# Altium PCB PCB.PcbDoc
Units mil, origin at the board's own origin, x right, y up, seen from the top; angles counter-clockwise.
Board outline 3935 x 3935 mil, 4 copper layers (Top Layer, GNDL, PWRL, Bottom Layer), stack 23.756 mil thick; 39 components, 61 nets, 233 pads, 284 vias.
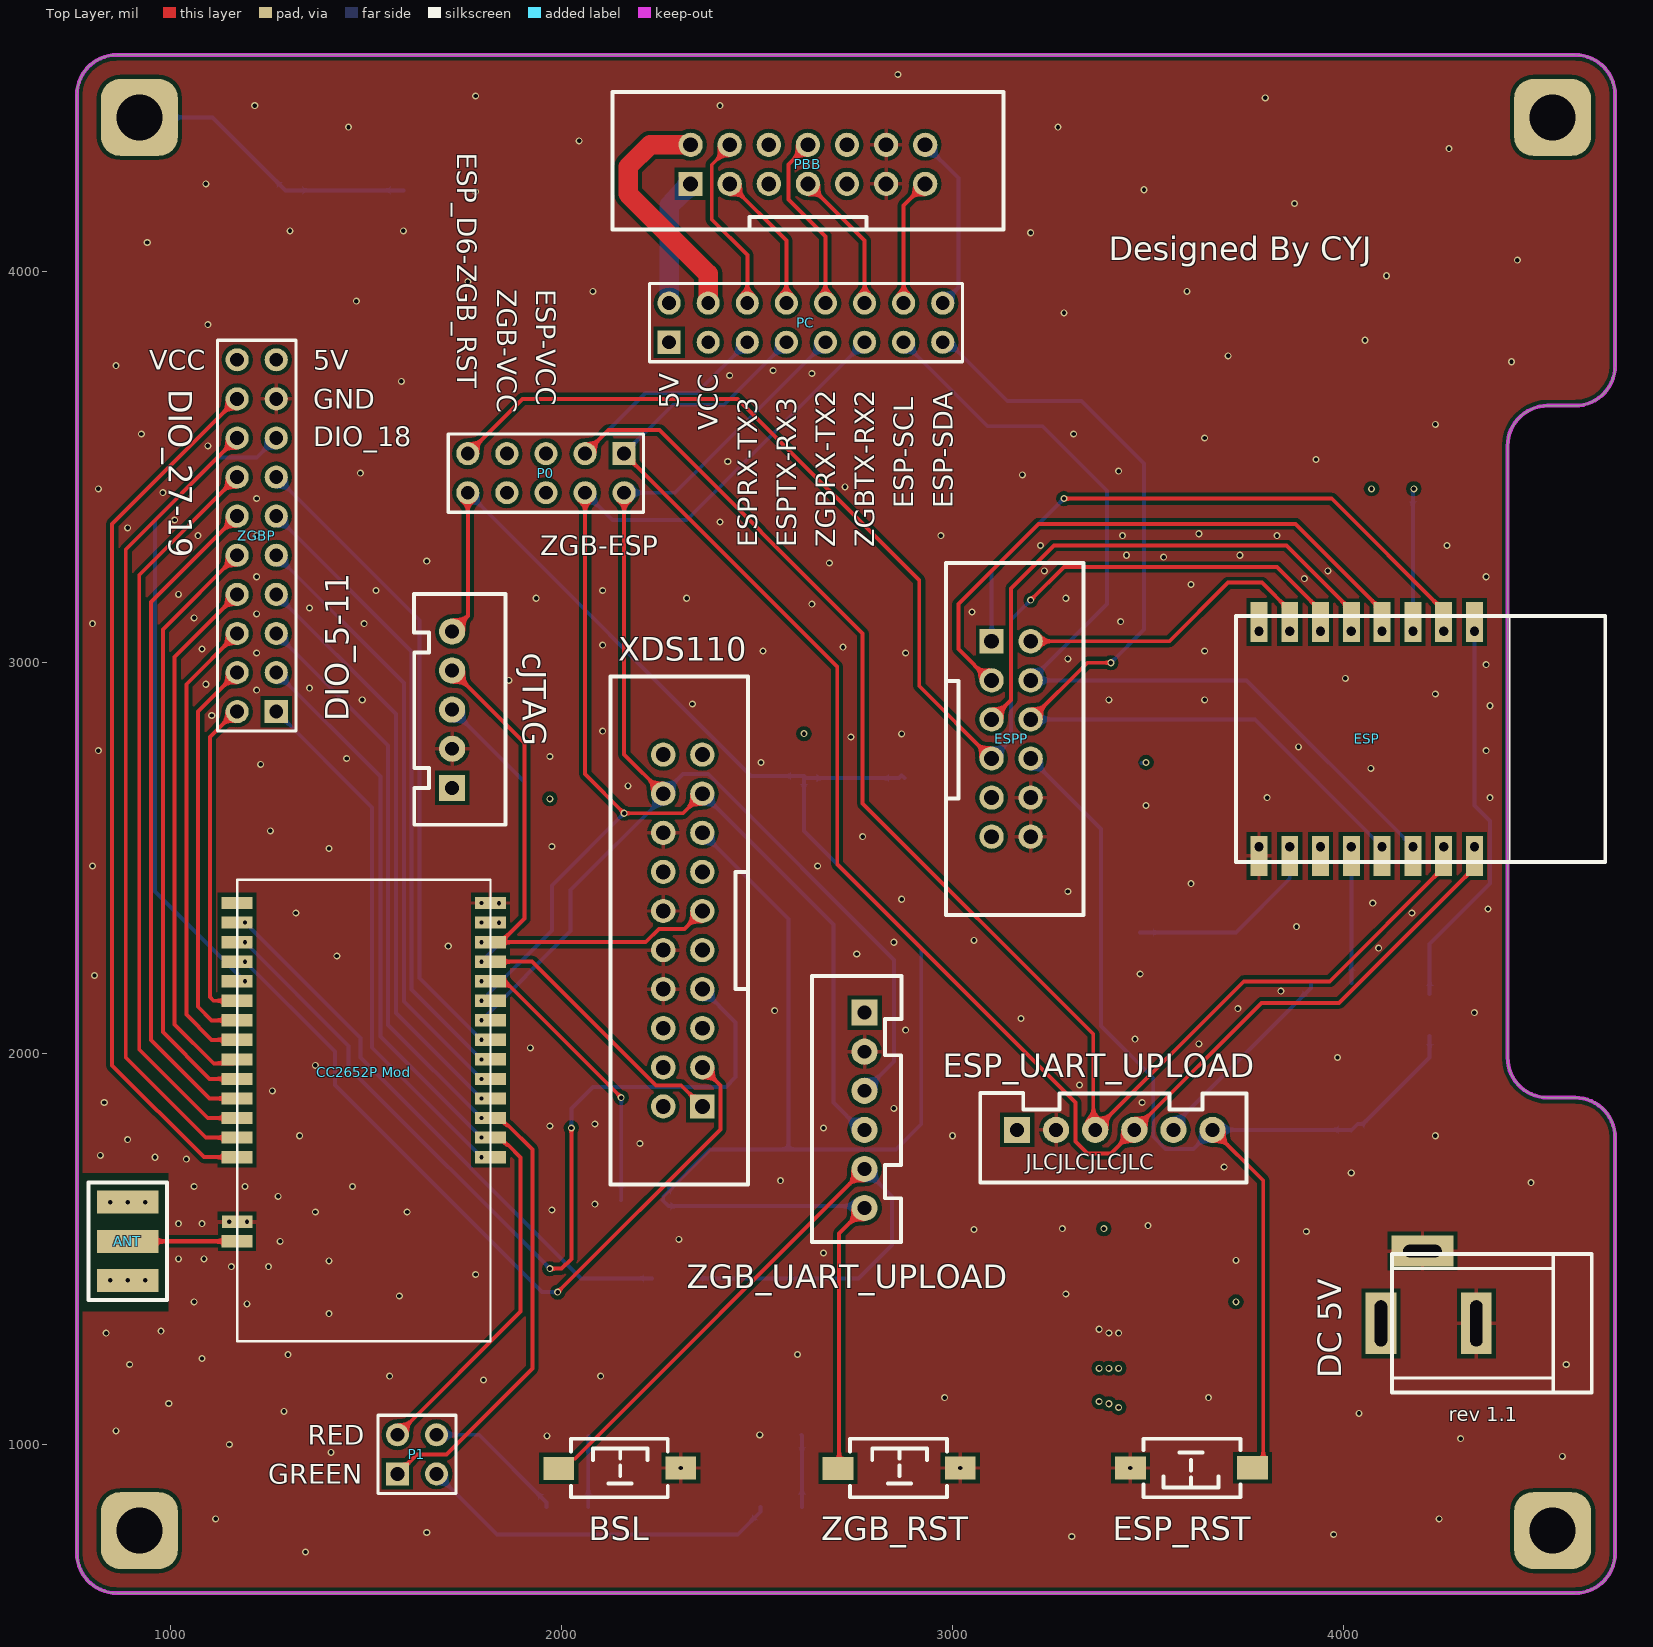
[diagram p0: Top Layer view]
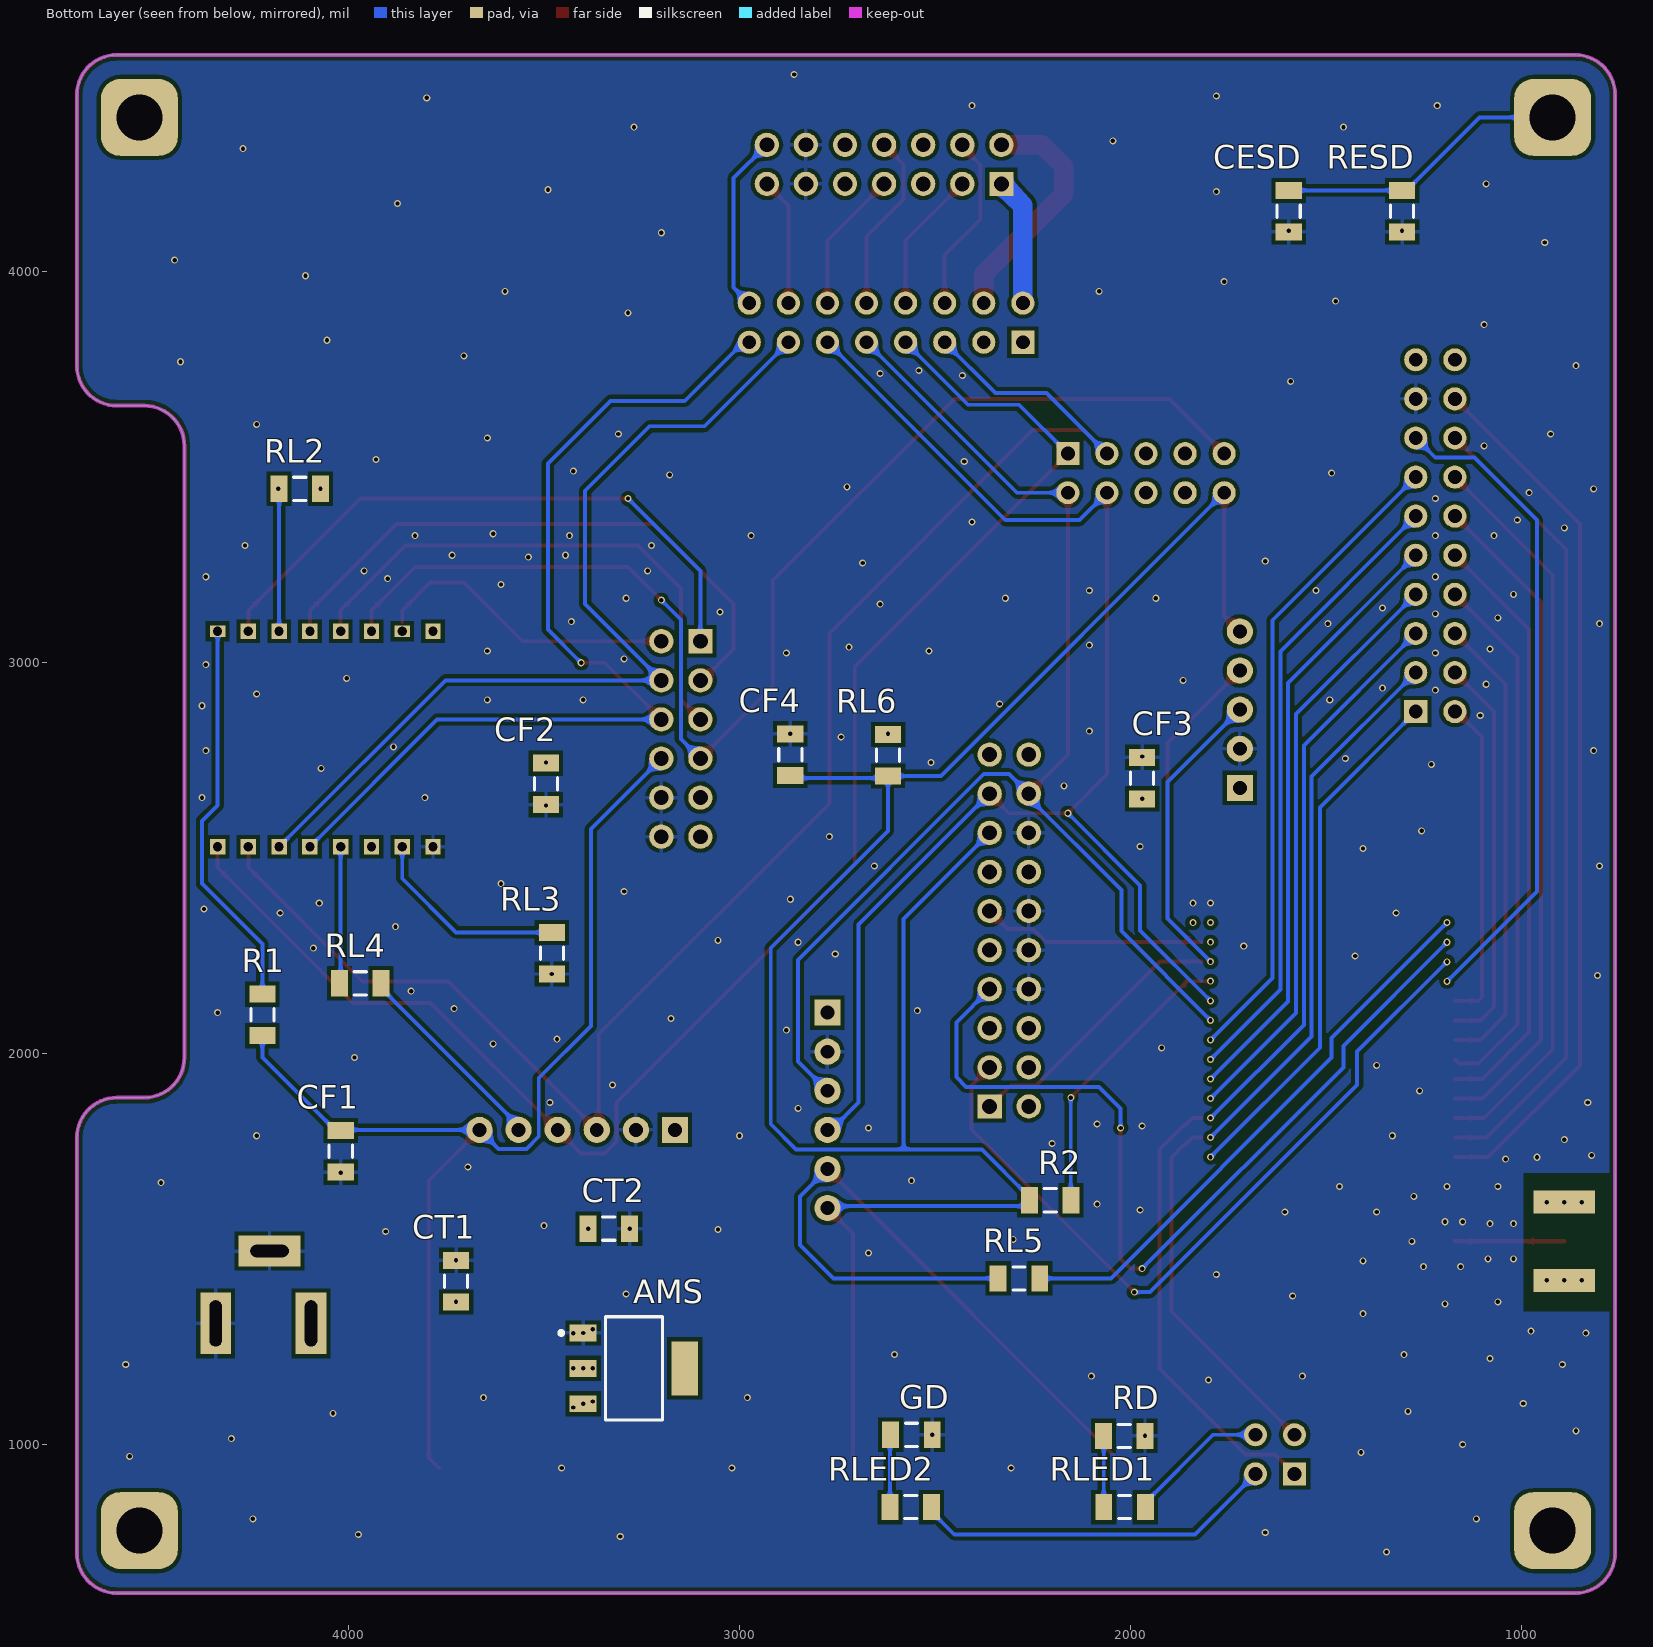
[diagram p1: Bottom Layer view, seen from below]
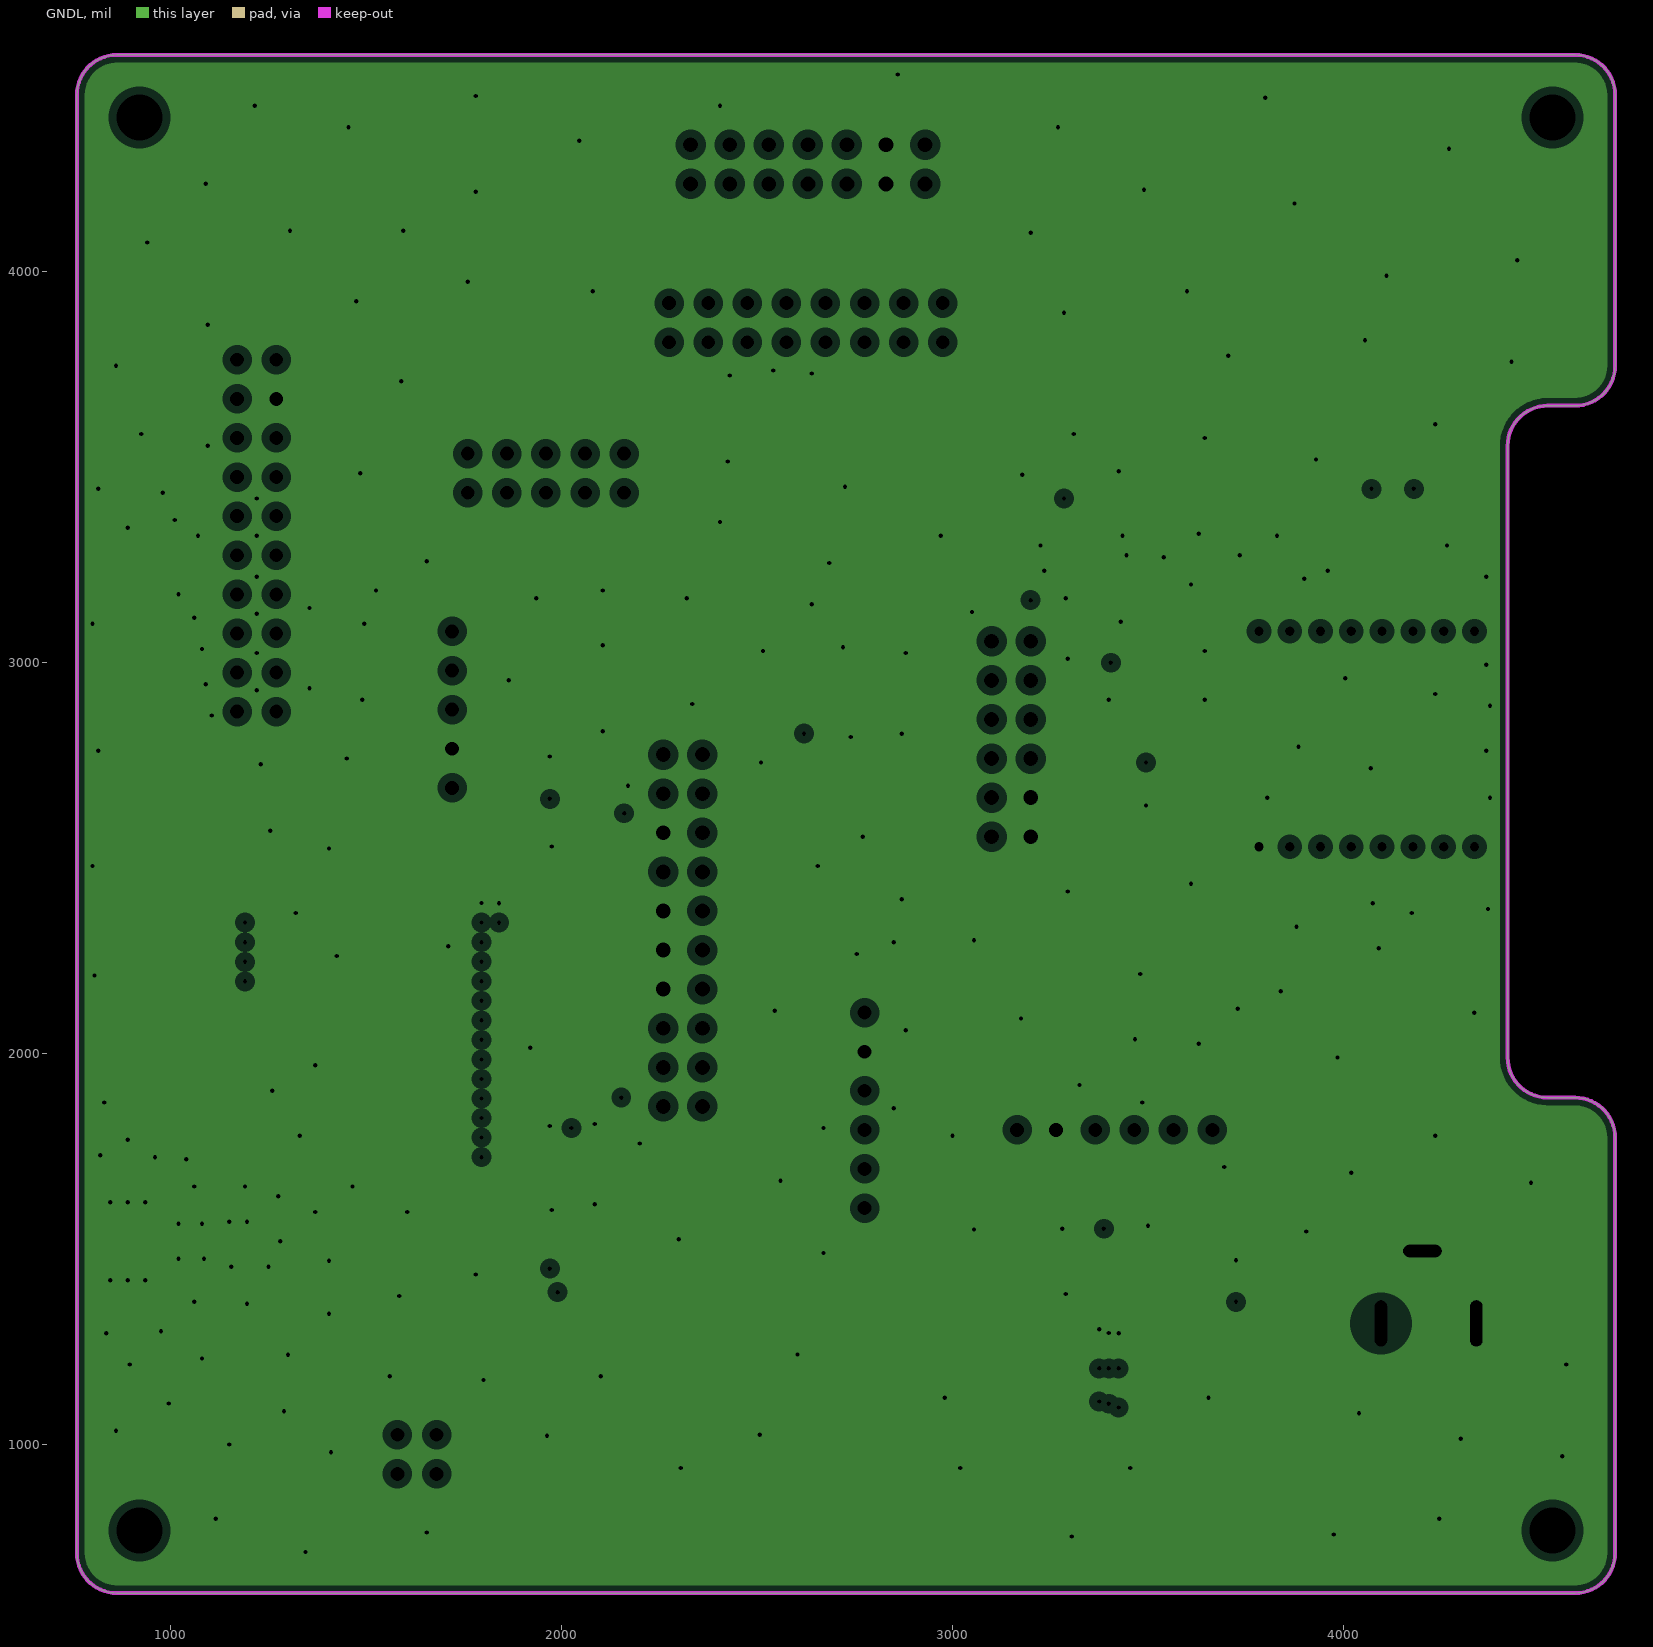
[diagram p2: GNDL, clearances drawn from the general rule]
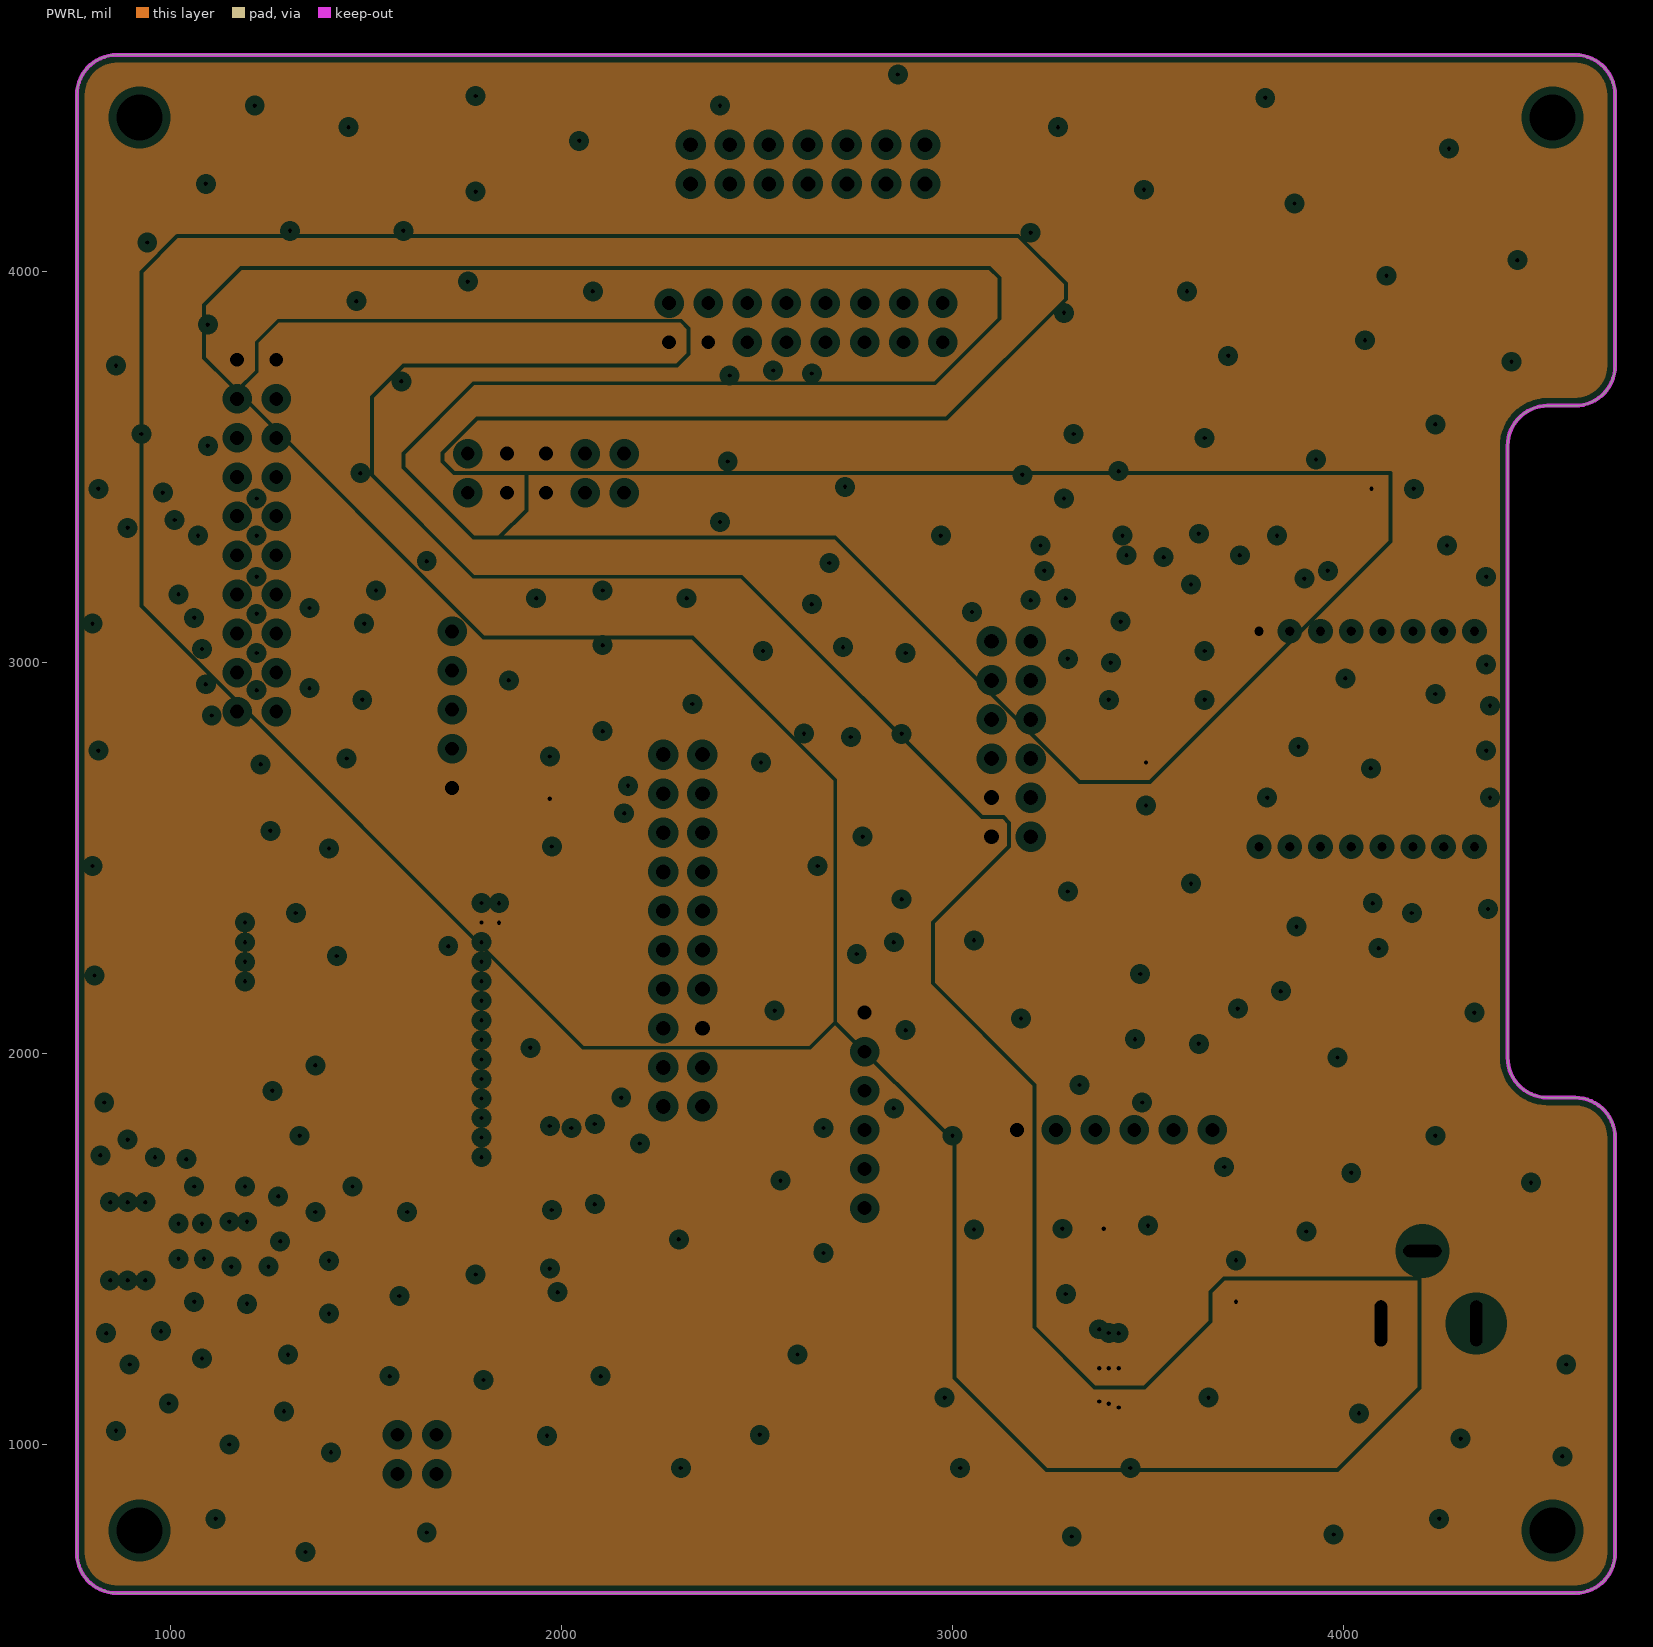
[diagram p3: PWRL, clearances drawn from the general rule]
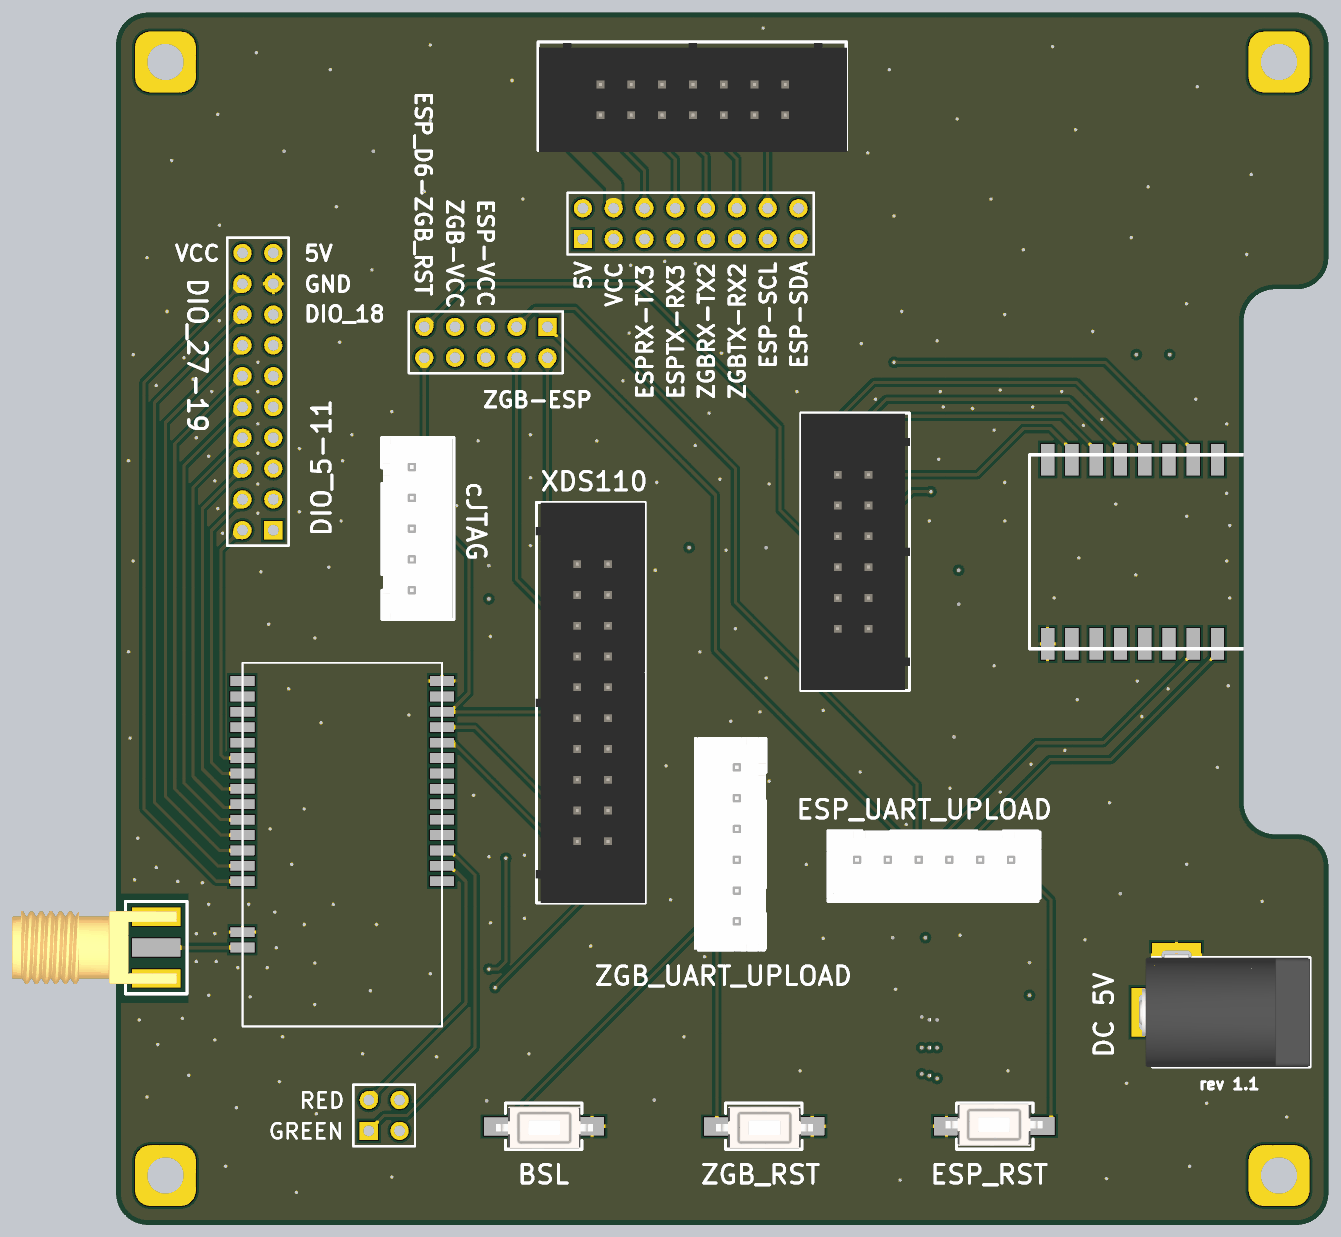
[diagram p4: 3D render of the assembled board from above, using the file's embedded part models]

## Layer stack, top to bottom
Top Solder: solder mask 0.4, Solder Resist, Dk 3.5
Top Layer: signal copper 1.4
Dielectric 2: prepreg 2.8, PP-006, Dk 4.1
GNDL: plane copper 1.378, net GND
Dielectric 1: dielectric 12.6, FR-4, Dk 4.8
PWRL: plane copper 1.378, net (Multiple Nets)
Dielectric 3: prepreg 2.8, PP-006, Dk 4.1
Bottom Layer: signal copper 1.4
Bottom Solder: solder mask 0.4, Solder Resist, Dk 3.5

## Board outline
760,722.43 ccw(c862.43,722.43) 862.43,620 4592.57,620 ccw(c4592.57,722.43) 4695,722.43 4695,1785 ccw(c4592.57,1785) 4592.57,1887.43 4522.43,1887.43 4522.43,1887.57 cw(c4522.43,1990) 4420,1990 4420,3555 cw(c4522.43,3555) 4522.43,3657.43 4522.43,3657.57 4592.57,3657.57 ccw(c4592.57,3760) 4695,3760 4695,4452.57 ccw(c4592.57,4452.57) 4592.57,4555 862.43,4555 ccw(c862.43,4452.57) 760,4452.57

## Design rules (kind name [scope] priority, off if disabled: settings)
Clearance [All] p1: gap=10 ignorepadtopadclearanceinfootprint=FALSE except(0: Arc-Hole Track-Hole SMDPad-Hole THPad-Hole Via-Hole Fill-Hole Poly-Hole Region-Hole Text-Hole)
ComponentClearance ComponentClearance_1 [HasFootprint('JLC_CLI_NO') vs HasFootprint('XH2.54-LI-6P')] p1: gap=0 collisioncheckmode=3 verticalgap=0 showdistances=FALSE
ComponentClearance [All] p2: gap=10 collisioncheckmode=3 verticalgap=10 showdistances=FALSE
PlaneClearance [All] p1: clearance=20
PlaneConnect PlaneConnect_4 [InNet('VCC')] p1: planeconnectstyle=Direct reliefexpansion=20 reliefentries=4 reliefconductorwidth=10 reliefairgap=10
PlaneConnect PlaneConnect_3 [InNet('ZGB_VCC')] p2: planeconnectstyle=Direct reliefexpansion=20 reliefentries=4 reliefconductorwidth=10 reliefairgap=10
PlaneConnect PlaneConnect_2 [InNet('ESP_VCC')] p3: planeconnectstyle=Direct reliefexpansion=20 reliefentries=4 reliefconductorwidth=10 reliefairgap=10
PlaneConnect PlaneConnect_1 [InNet('+5')] p4: planeconnectstyle=Direct reliefexpansion=20 reliefentries=4 reliefconductorwidth=10 reliefairgap=10
PlaneConnect [All] p5: pad.planeconnectstyle=Relief pad.reliefexpansion=20 pad.reliefentries=4 pad.reliefconductorwidth=10 pad.reliefairgap=10 via.planeconnectstyle=Direct via.reliefexpansion=20 via.reliefentries=4 via.reliefconductorwidth=10 via.reliefairgap=10
PolygonConnect [All] p1: thpad.connectstyle=Relief thpad.reliefconductorwidth=10 thpad.reliefentries=4 thpad.polygonreliefangle="90 Angle" thpad.airgapwidth=10 smdpad.connectstyle=Relief smdpad.reliefconductorwidth=10 smdpad.reliefentries=4 smdpad.polygonreliefangle="90 Angle" smdpad.airgapwidth=10 via.connectstyle=Direct via.reliefconductorwidth=10 via.reliefentries=4 via.polygonreliefangle="90 Angle" via.airgapwidth=10
RoutingVias [All] p1: holewidth=28 width=50 viastyle="Through Hole" minholewidth=28 minwidth=50 maxholewidth=28 maxwidth=50
SolderMaskExpansion [All] p1: expansion=4 istentingtop=FALSE
Width [All] p1: maxlimit=99 minlimit=5 preferedwidth=10 minimp=50.000000 maximp=50.000000 favimp=50.000000
27 further rules are at their usual default settings.

## Classes and differential pairs
component class Sheet: AMS ANT BSL "CC2652P Mod" CESD CF1 CF2 CF3 CF4 cJTAG CT1 CT2 "DC 5V" ESP ESP_RST ESP_UART_UPLOAD ESPP GD P0 P1 PBB PC R1 R2 RD RESD RL2 RL3 RL4 RL5 RL6 RLED1 RLED2 XDS110 ZGB_RST ZGB_UART_UPLOAD ZGBP

## Components (designator, comment, footprint, x,y, rotation, side; value= is the part's Value field where it differs from the comment)
AMS "AMS1117" SOT-223-2 3270,1195 r270 bottom
ANT "ANTENNA" SMA-2 890,1520 r270 top
BSL "SW-PB" "TSW SMD-3*6*2.5" 2150,940 r0 top
"CC2652P Mod" "RF-BM-2652P2" RF-BM-2652P2 1820.93,2448.7 r180 top locked
CESD "Cap" My1206 1595.03,4155.2 r90 bottom value=0.1uF
CF1 "Cap" My1206 4020,1750 r90 bottom value=0.1uF
CF2 "Cap" My1206 3495,2690 r90 bottom value=0.1uF
CF3 "Cap" My1206 1970,2705 r270 bottom value=0.1uF
CF4 "Cap" My1206 2870,2765 r270 bottom value=0.1uF
cJTAG "cJtag_Debugger" XH2.54-LI-5P 1720,2880 r90 top locked
CT1 "Cap Semi" My1206 3725,1418.15 r90 bottom value=10uF
CT2 "Cap Semi" My1206 3333.95,1552.16 r180 bottom value=22uF
"DC 5V" "DC005" DC-005 4340,1310 r0 top
Designator42 "Comment" JLC_CLI_NO 6635,3615 r0 top
Designator43 "Comment" DesignedByCYJ 5300,4000 r0 top
ESP "ESP-12E&F Module" ESP12 4030,2805 r270 top
ESP_RST "SW-PB" "TSW SMD-3*6*2.5" 3610,940 r180 top
ESP_UART_UPLOAD "DebugPort" XH2.54-LI-6P 3415,1805 r0 top
ESPP "Header 6X2" IDC3-6*2 3100,3055 r270 top locked
GD "LED0" My1206 2560,1025 r180 bottom
P0 "Header 5X2" HDR2X5 2160,3535 r180 top
P1 "Header 2X2" HDR2X2 1580,925 r0 top
PBB "Header 7X2" IDC3-7*2 2330,4225 r0 top
PC "Header 8X2" HDR2X8 2275,3820 r0 top
R1 "Res2" My1206 4220.49,2099.05 r90 bottom value=1k
R2 "Res2" My1206 2205,1625 r180 bottom value=1k
RD "LED0" My1206 2015.79,1022.31 r180 bottom
RESD "Res2" My1206 1305.03,4155.2 r90 bottom value=1M
RL2 "Res2" My1206 4125,3445 r0 bottom value=10K
RL3 "Res2" My1206 3480,2256.85 r270 bottom value=10K
RL4 "Res2" My1206 3970,2180 r180 bottom value=1K
RL5 "Res2" My1206 2285,1425 r0 bottom value=1K
RL6 "Res2" My1206 2620,2763.5 r90 bottom value=10K
RLED1 "Res2" My1206 2015,840 r0 bottom value=470
RLED2 "Res2" My1206 2561.85,840 r0 bottom value=470
XDS110 "XDS110" IDC3-10*2 2360,1865 r90 top
ZGB_RST "SW-PB" "TSW SMD-3*6*2.5" 2864.68,940 r0 top
ZGB_UART_UPLOAD "DebugPort" XH2.54-LI-6P 2775,1855 r270 top
ZGBP "Header 10X2" HDR2X10 1270,2875 r90 top

## Footprints (in the part's own frame and the unit in brackets; to place one, negate y for a bottom-side part, rotate by r counter-clockwise, add the part's x,y. Pads: shape width x height; smd on the part's side, far side on the other; paste and mask are expansions set on the pad)
DC-005 [mm] "5.5*2.1mm，DC30V,2.5A"
  rect 2x4 hole 0.8 slot 3 at 90 deg: 1(-6.2,0) 2(0,0)
  rect 4x2 hole 0.8 slot 2.5 at 0 deg: 3(-3.5,4.7)
  silkscreen extent -5.48,-4.5 7.5,4.5, body extent -6.55,-4.5 7.5,4.8, height 11.2
DesignedByCYJ [mil]
ESP12 [mm]
  rect 2.6x1.1 smd: 1(-7.6,7.75) 2(-7.6,5.75) 3(-7.6,3.75) 4(-7.6,1.75) 5(-7.6,-0.25) 6(-7.6,-2.25) 7(-7.6,-4.25) 8(-7.6,-6.25) 15(7.6,-6.25) 16(7.6,-4.25) 17(7.6,-2.25) 18(7.6,-0.25) 19(7.6,1.75) 20(7.6,3.75) 21(7.6,5.75) 22(7.6,7.75)
  rect 0.762x1 hole 0.6: 1(-7,7.75) 7(-7,-4.25)
  rect 0.762x1 / inner rect 0.762x1 / far side rect 1x1 hole 0.6: 2(-7,5.75) 3(-7,3.75) 4(-7,1.75) 5(-7,-0.25) 6(-7,-2.25) 8(-7,-6.25) 15(7,-6.25) 16(7,-4.25) 17(7,-2.25) 18(7,-0.25) 19(7,1.75) 20(7,3.75) 21(7,5.75) 22(7,7.75)
  silkscreen extent -8,-7.75 8,16.25
HDR2X2 [mm] "Connector; Header; 2x2 Position"
  rect 1.5x1.5 hole 0.9: 1(0,0)
  round 1.5 hole 0.9: 2(0,2.54) 3(2.54,0) 4(2.54,2.54)
  silkscreen extent -1.27,-1.27 3.81,3.81
HDR2X5 [mm] "Connector; Header; 5x2 Position"
  rect 1.5x1.5 hole 0.9: 1(0,0)
  round 1.5 hole 0.9: 2(0,2.54) 3(2.54,0) 4(2.54,2.54) 5(5.08,0) 6(5.08,2.54) 7(7.62,0) 8(7.62,2.54) 9(10.16,0) 10(10.16,2.54)
  silkscreen extent -1.27,-1.27 11.43,3.81
HDR2X8 [mm] "Connector; Header; 8x2 Position"
  rect 1.5x1.5 hole 0.9: 1(0,0)
  round 1.5 hole 0.9: 2(0,2.54) 3(2.54,0) 4(2.54,2.54) 5(5.08,0) 6(5.08,2.54) 7(7.62,0) 8(7.62,2.54) 9(10.16,0) 10(10.16,2.54) 11(12.7,0) 12(12.7,2.54) 13(15.24,0) 14(15.24,2.54) 15(17.78,0) 16(17.78,2.54)
  silkscreen extent -1.27,-1.27 19.05,3.81
HDR2X10 [mm] "Connector; Header; 10x2 Position"
  rect 1.5x1.5 hole 0.9: 1(0,0)
  round 1.5 hole 0.9: 2(0,2.54) 3(2.54,0) 4(2.54,2.54) 5(5.08,0) 6(5.08,2.54) 7(7.62,0) 8(7.62,2.54) 9(10.16,0) 10(10.16,2.54) 11(12.7,0) 12(12.7,2.54) 13(15.24,0) 14(15.24,2.54) 15(17.78,0) 16(17.78,2.54) 17(20.32,0) 18(20.32,2.54) 19(22.86,0) 20(22.86,2.54)
  silkscreen extent -1.27,-1.27 24.13,3.81
IDC3-6*2 [mil]
  rect 62x62 hole 38: 1(0,0)
  round 62 hole 38: 2(0,100) 3(100,0) 4(100,100) 5(200,0) 6(200,100) 7(300,0) 8(300,100) 9(400,0) 10(400,100) 11(500,0) 12(500,100)
  silkscreen extent -200,-117 700,235, body extent -199,-117 699,237, height 354
IDC3-7*2 [mil]
  rect 62x62 hole 38: 1(0,0)
  round 62 hole 38: 2(0,100) 3(100,0) 4(100,100) 5(200,0) 6(200,100) 7(300,0) 8(300,100) 9(400,0) 10(400,100) 11(500,0) 12(500,100) 13(600,0) 14(600,100)
  silkscreen extent -200,-117 800,235, body extent -198,-122 802,232, height 354
IDC3-10*2 [mil]
  rect 62x62 hole 38: 1(0,0)
  round 62 hole 38: 2(0,100) 3(100,0) 4(100,100) 5(200,0) 6(200,100) 7(300,0) 8(300,100) 9(400,0) 10(400,100) 11(500,0) 12(500,100) 13(600,0) 14(600,100) 15(700,0) 16(700,100) 17(800,0) 18(800,100) 19(900,0) 20(900,100)
  silkscreen extent -200,-117 1100,235, body extent -200,-116 1099,238, height 354
JLC_CLI_NO [mil]
My1206 [mm]
  rect 1.1x1.7 smd: 1(-1.35,0) 2(1.35,0)
  silkscreen extent -0.4,-0.75 0.4,0.75
RF-BM-2652P2 [mm]
  rect 2x0.8 smd: 1(0.076,18.12) 2(0.076,16.85) 3(0.076,15.58) 4(0.076,14.31) 5(0.076,13.04) 6(0.076,11.77) 7(0.076,10.5) 8(0.076,9.23) 9(0.076,7.96) 10(0.076,6.69) 11(0.076,5.42) 12(0.076,4.15) 13(0.076,2.88) 14(0.076,1.61) 15(16.538,1.611) 16(16.538,2.881) 17(16.538,4.151) 18(16.538,5.421) 19(16.538,6.691) 20(16.538,7.961) 21(16.538,9.231) 22(16.538,10.501) 23(16.538,11.771) 24(16.538,13.041) 25(16.538,14.311) 26(16.538,15.581) 27(16.538,16.851) 28(16.538,18.121) 29(16.534,22.319) 30(16.541,23.588)
  silkscreen extent 0.08,0.1 16.52,30.09
SMA-2 [mm]
  rect 1.5x4 smd: 1(0,0)
  rect 1.5x4 all layers, no hole: 2(2.54,0) 3(-2.54,0)
  silkscreen extent -3.81,-2.54 3.81,2.54, body extent -3,-11.89 3,1.71, height 3.2
SOT-223-2 [mm] "SOT-223/SC-73; 4 Leads; Body 6.7 x 7.3 mm, inc. leads (LxW max)"
  rect 1.1x1.75 smd: 1(-2.3,-3.3) 2(0,-3.3) 3(2.3,-3.3)
  rect 3.5x1.75 smd: 4(0,3.3)
  silkscreen extent -3.35,-4.85 3.35,1.85, body extent -3.35,-3.7 3.35,3.5, height 1.85
"TSW SMD-3*6*2.5" [mm] "3*6*2.5mm"
  rect 2x1.5 smd: 1(-3.996,-0.02) 2(3.937,0)
  silkscreen extent -3.21,-1.9 3.09,1.9, body extent -4,-1.88 4,1.62, height 2.59
XH2.54-LI-5P [mm] "接插件，5P"
  rect 1.7x1.7 hole 0.9: 1(-5.08,0)
  round 1.7 hole 0.9: 2(-2.54,0) 3(0,0) 4(2.54,0) 5(5.08,0)
  silkscreen extent -7.48,-3.45 7.52,2.49, body extent -7.58,-3.3 7.58,2.4, height 7.03
XH2.54-LI-6P [mm] "接插件，6P"
  rect 1.7x1.7 hole 0.9: 1(-6.35,0)
  round 1.7 hole 0.9: 2(-3.81,0) 3(-1.27,0) 4(1.27,0) 5(3.81,0) 6(6.35,0)
  silkscreen extent -8.74,-3.43 8.56,2.39, body extent -8.85,-3.3 8.85,2.4, height 7.03

## Part data
BSL ESP_RST ZGB_RST: "Switch", LatestRevisionDate=17-Jul-2002, LatestRevisionNote="Re-released for DXP Platform.", PackageDescription="Switch; 2 Leads", PackageReference=SPST-2, Published=24-Mar-1999, Publisher="Altium Limited"
CESD CF1 CF2 CF3 CF4: "Capacitor", LatestRevisionDate=17-Jul-2002, LatestRevisionNote="Re-released for DXP Platform.", PackageDescription="Radial Cap, Thru-Hole; 2 Leads; 0.3 in Pin Spacing", PackageReference=RAD-0.3, Published=8-Jun-2000, Publisher="Altium Limited"
CT1 CT2: "Capacitor (Semiconductor SIM Model)", LatestRevisionDate=29-May-2009, LatestRevisionNote="IPC-7351 Footprint Added.", PackageDescription="Chip Capacitor", PackageReference=C1206, Published=8-Jun-2000, Publisher="Altium Limited"
ESPP: "Header, 6-Pin, Dual row", LatestRevisionDate=17-Jul-2002, LatestRevisionNote="Re-released for DXP Platform.", Publisher="Altium Limited"
GD RD: "Typical INFRARED GaAs LED", LatestRevisionDate=08-Jul-2005, LatestRevisionNote="Mech Layer 1 removed.", PackageDescription="LED; 2 Leads", PackageReference=LED-0, Published=8-Jun-2000, Publisher="Altium Limited"
P0: "Header, 5-Pin, Dual row", LatestRevisionDate=17-Jul-2002, LatestRevisionNote="Re-released for DXP Platform.", Publisher="Altium Limited"
P1: "Header, 2-Pin, Dual row", LatestRevisionDate=17-Jul-2002, LatestRevisionNote="Re-released for DXP Platform.", Publisher="Altium Limited"
PBB: "Header, 7-Pin, Dual row", LatestRevisionDate=17-Jul-2002, LatestRevisionNote="Re-released for DXP Platform.", Publisher="Altium Limited"
PC: "Header, 8-Pin, Dual row", LatestRevisionDate=17-Jul-2002, LatestRevisionNote="Re-released for DXP Platform.", Publisher="Altium Limited"
R1 R2 RESD RL2 RL3 RL4 RL5 RL6 RLED1 RLED2: "Resistor", LatestRevisionDate=17-Jul-2002, LatestRevisionNote="Re-released for DXP Platform.", PackageDescription="Axial Device, Thru-Hole; 2 Leads; 0.4 in Pin Spacing", PackageReference=AXIAL-0.4, Published=8-Jun-2000, Publisher="Altium Limited"
ZGBP: "Header, 10-Pin, Dual row", LatestRevisionDate=17-Jul-2002, LatestRevisionNote="Re-released for DXP Platform.", Publisher="Altium Limited"

## Free pads (board coordinates)
  rrect50% 196.85x196.85 hole 118.11: 1(920,4395) 2(4535,4395) 3(4535,780) 4(920,780)

## Via types
v1: diameter 18, hole 11, Top Layer to Bottom Layer, tented both sides, 226 vias
v2: diameter 18, hole 11, Top Layer to Bottom Layer, tented top, 27 vias
v3: diameter 18, hole 11, Top Layer to Bottom Layer, tented bottom, 25 vias
v4: diameter 18, hole 11, Top Layer to Bottom Layer, 6 vias

## Nets (pads, with @x,y where several pads share a name; then routed paths per layer and width w, separated by ;. In a path a pad name is that pad's centre, name@x,y a point inside that pad or via, vN(x,y) a via of type N, cw(c..) or ccw(c..) an arc to the next point about the centre after c; other vN are vias at no path point)
+5: "DC 5V.1" AMS.3 CT1.1 ESP_UART_UPLOAD.1 ESPP.11 PC.1 ZGB_UART_UPLOAD.1 ZGBP.19
  other v2: 3425,1095 3399.92,1104.45 3375,1110 3725,1365
ADC: ESP.2 ESPP.1 | length 1561.1
  Top Layer w10: v1(3285,3420) 3970.12,3420 4256.38,3133.74 ESP.2@4256.38,3104.21
  Bottom Layer w10: ESPP.1 3100,3235 v1(3285,3420)
ANT: "CC2652P Mod.30" ANT.1 | length 279.7
  Top Layer w11.55: ANT.1 1169.71,1520.03
BB_3V3: PBB.2 PC.4 | length 616.6
  Top Layer w50: PBB.2 2226.45,4325 2170.29,4268.85 2170.29,4199.71 2375,3995 PC.4
BB_5V: PBB.1 PC.2 | length 327.8
  Bottom Layer w50: PC.2 2275,4170 PBB.1
BB_I2C_CLK: PBB.13 PC.14 | length 327.8
  Top Layer w10: PC.14 2875,4170 PBB.13
BB_I2C_SDA: PBB.14 PC.16 | length 456.8
  Bottom Layer w10: PBB.14 3015,4240 3015,3960 PC.16
BSL: BSL.1 RL5.2 ZGB_UART_UPLOAD.5 | length 1865.6
  Top Layer w10: BSL.1 2017.21,963.74 2033.74,963.74 ZGB_UART_UPLOAD.5
  Bottom Layer w10: RL5.2 2760,1425 2845,1510 2845,1635 ZGB_UART_UPLOAD.5
D0: ESP.4 ESPP.3 | length 1521.7
  Top Layer w10: ESPP.3@3097.5,2952.5 3015,3035 3015,3150 3220,3355 3877.64,3355 4098.9,3133.74 ESP.4@4098.9,3104.21
D1: ESP.20 ESPP.4 PC.13 | length 2397.1
  Bottom Layer w10: PC.13 3090,3605 3230,3605 3395,3440 3395,3150 ESPP.4 3752.05,2955 ESP.20@4177.64,2529.41
D2: ESP.19 ESPP.6 PC.15 | length 2488.4
  Top Layer w10: ESPP.6 3345,3000 v1(3405,3000)
  Bottom Layer w10: PC.15 2990,3820 2995,3815 2995,3813.27 2997.66,3810.61 2999.39,3810.61 3140,3670 3330,3670 3490,3510 3490,3085 v1(3405,3000) ; ESPP.6 3773.31,2855 ESP.19@4098.9,2529.41
D5: ESP.5 ESPP.5 | length 1369.8
  Top Layer w10: ESPP.5 3150,2905 3150,3190 3260,3300 3853.9,3300 4020.16,3133.74 ESP.5@4020.16,3104.21
D6: ESP.6 ESPP.7 P0.9 | length 3235.9
  Top Layer w10: P0.9 1900,3675 2450,3675 2915,3210 2915,2940 ESPP.7 ; v1(3200,3160) 3285,3245 3830.16,3245 3941.42,3133.74 ESP.6@3941.42,3104.21
  Bottom Layer w10: ESPP.7 3150,2805 3150,3110 v1(3200,3160)
D7: ESP.7 ESPP.2 | length 783.9
  Top Layer w10: ESPP.2 3555,3055 3705,3205 3791.42,3205 3862.68,3133.74 ESP.7@3862.68,3104.21
DIO_5: "CC2652P Mod.1" ZGBP.1 | length 1357.1
  Bottom Layer w10: ZGBP.1 1515,2630 1515,2015.11 v3(1794.82,1735.29)
DIO_6: "CC2652P Mod.2" P1.2 ZGBP.3 | length 2345.2
  Top Layer w10: P1.2 1895,1340 1895,1734.6 1863.52,1766.08 1860.81,1766.08 1841.56,1785.33 1817.94,1785.33
  Bottom Layer w10: ZGBP.3 1536.34,2708.66 1536.34,2043.77 v3(1794.82,1785.29)
DIO_7: "CC2652P Mod.3" P1.1 ZGBP.5 | length 2614
  Top Layer w10: P1.1 1630,975 1705,975 1925,1195 1925,1754.6 1863.52,1816.08 1860.81,1816.08 1841.56,1835.33 1817.94,1835.33
  Bottom Layer w10: ZGBP.5 1556.34,2788.66 1556.34,2073.77 v3(1794.82,1835.29)
DIO_8: "CC2652P Mod.4" ZGBP.7 | length 1507.1
  Bottom Layer w10: ZGBP.7 1576.34,2868.66 1576.34,2103.77 v3(1794.82,1885.29)
DIO_9: "CC2652P Mod.5" ZGBP.9 | length 1557.1
  Bottom Layer w10: ZGBP.9 1596.34,2948.66 1596.34,2133.77 v3(1794.82,1935.29)
DIO_10: "CC2652P Mod.6" ZGBP.11 | length 1607.1
  Bottom Layer w10: ZGBP.11 1616.34,3028.66 1616.34,2163.77 v3(1794.82,1985.29)
DIO_11: "CC2652P Mod.7" ZGBP.13 | length 1657.1
  Bottom Layer w10: ZGBP.13 1636.34,3108.66 1636.34,2193.77 v3(1794.82,2035.29)
DIO_18: "CC2652P Mod.19" ZGBP.15 | length 1672.3
  Bottom Layer w10: v3(1190,2185) 960,2415 960,3365 1120,3525 1220,3525 ZGBP.15
DIO_19: "CC2652P Mod.20" ZGBP.2 | length 835.8
  Top Layer w10: 1169.82,2135.29 1109.71,2135.29 1100,2145 1100,2810 1165,2875 ZGBP.2
DIO_20: "CC2652P Mod.21" ZGBP.4 | length 1010.6
  Top Layer w10: 1169.82,2085.29 1104.71,2085.29 1070,2120 1070,2875 ZGBP.4
DIO_21: "CC2652P Mod.22" ZGBP.6 | length 1185.5
  Top Layer w10: 1169.82,2035.29 1104.71,2035.29 1040,2100 1040,2945 ZGBP.6
DIO_22: "CC2652P Mod.23" ZGBP.8 | length 1371.8
  Top Layer w10: 1169.82,1985.29 1159.53,1975 1110,1975 1010,2075 1010,3015 ZGBP.8
DIO_23: "CC2652P Mod.24" ZGBP.10 | length 1538.1
  Top Layer w10: 1169.82,1935.29 1099.71,1935.29 980,2055 980,3085 ZGBP.10
DIO_24: "CC2652P Mod.25" ZGBP.12 | length 1713
  Top Layer w10: 1169.82,1885.29 1099.71,1885.29 950,2035 950,3155 ZGBP.12
DIO_25: "CC2652P Mod.26" ZGBP.14 | length 1891.1
  Top Layer w10: 1169.82,1835.29 1094.71,1835.29 919.6,2010.4 919.6,3224.6 ZGBP.14
DIO_26: "CC2652P Mod.27" ZGBP.16 | length 2072.7
  Top Layer w10: 1169.82,1785.29 1089.71,1785.29 885,1990 885,3290 ZGBP.16
DIO_27: "CC2652P Mod.28" ZGBP.18 | length 2254.6
  Top Layer w10: 1169.82,1735.29 1084.71,1735.29 850,1970 850,3355 ZGBP.18
ESP_EN: ESP.3 RL2.2 | length 365.4
  Bottom Layer w10: ESP.3@4177.64,3080.59 4177.64,3442.64 v2(4180,3445)
ESP_RST: CF1.2 ESP_RST.1 ESP_UART_UPLOAD.6 ESPP.8 R1.1 | length 2902.1
  Top Layer w10: ESP_UART_UPLOAD.6 3795,1675 3795,965.31 3770.47,940.79 ESP_RST.1
  Bottom Layer w10: ESPP.8 3380,2575 3380,2070.73 3513.46,1937.27 3513.46,1788 3544.93,1756.54 3616.54,1756.54 ESP_UART_UPLOAD.6 4018.15,1805 CF1.2 4036.65,1819.8 4049.8,1819.8 4220.49,1990.49 R1.1
ESP_RX: ESP.21 ESP_UART_UPLOAD.3 P0.3 PC.5 | length 4198.7
  Top Layer w10: P0.3 2120,3595 2250,3595 2770,3075 2770,2640 3360,2050 3360,1810 ESP_UART_UPLOAD.3 3745,2185 3965.12,2185 4256.38,2476.26 ESP.21@4256.38,2505.79
  Bottom Layer w10: P0.3 2215,3690 2345,3690 PC.5
ESP_TX: ESP.22 ESP_UART_UPLOAD.4 P0.1 PC.7 | length 4136.4
  Top Layer w10: P0.1 2705,2990 2705,2485 3315,1875 3315,1775 3345,1745 3405,1745 ESP_UART_UPLOAD.4 3790,2130 3988.86,2130 4335.12,2476.26 ESP.22@4335.12,2505.79
  Bottom Layer w10: P0.1 2285,3660 2415,3660 PC.7
ESP_VCC: CF2.2 ESP.8 P0.6 RL2.1 | length 11.8
  Bottom Layer w10: CF2.2@3483.19,2743.15 CF2.2
  other v2: 3495,2745 4071.85,3445
GND: "CC2652P Mod.14" "CC2652P Mod.29" "DC 5V.2" "DC 5V.3" AMS.1 ANT.2 ANT.3 BSL.2 CESD.1 CF1.1 CF2.1 CF3.1 CF4.1 cJTAG.2 CT1.2 CT2.2 ESP.15 ESP_RST.2 ESP_UART_UPLOAD.2 ESPP.10 ESPP.12 GD.2 PBB.11 PBB.12 RD.2 RESD.1 RL3.2 XDS110.8 XDS110.10 XDS110.12 XDS110.16 ZGB_RST.2 ZGB_UART_UPLOAD.2 ZGBP.17
  other v1: 1345,725 3305,765 3975,770 1655,775 1115,810 4245,810 4560,970 1410,980 1150,1000 4300,1015 860,1035 4040,1080 1290,1085 995,1105 2980,1120 3655,1120 1800,1165 1560,1175 2100,1175 895,1205 4570,1205 1080,1220 1300,1230 2603.18,1230.18 835,1285 975,1290 1405,1335 1195,1360 1060,1365 1585,1380 3290,1385 1780,1435 1155,1455 1250,1455 1405,1470 1020,1475 1085,1475 2670,1490 1280,1520 2300,1525 3905,1545 3055,1550 3500,1560 1020,1565 1080,1565 1370,1595 1605,1595 1975,1600 2085,1615 1275,1635 1060,1660 1190,1660 1465,1660 4480,1670 2560,1675 3695,1710 1040,1730 960,1735 820,1740 2200,1770 890,1780 1330,1790 3000,1790 4235,1790 2670,1810 1970,1815 2085,1820 2850,1860 830,1875 3485,1875 1260,1905 3325,1920 1370,1970 3985,1990 1920,2015 3630,2025 3466.97,2036.97 2880,2060 3175,2090 4335,2105 2545,2110 3730,2115 3840,2160 805,2200 1425,2250 2755,2255 4090,2270 1710,2275 2850,2285 3055,2290 3880,2325 1320,2360 4175,2360 4370,2370 4075,2385 2870,2395 3295,2415 3610,2435 800,2480 2655,2480 1405,2525 1975,2530 2770,2555 1255,2570 3805,2655 4375,2655 2170,2685 4070,2730 1230,2740 2510,2745 1450,2755 815,2775 4365,2775 3885,2785 2740,2810 2105,2825 1105,2865 4375,2890 2334.47,2894.47 1490,2905 3400,2905 3645,2905 4235,2920 1220,2930 1355,2935 1090,2945 1865,2955 4005,2960 4365,2995 3295,3010 1220,3025 2880,3025 2515,3030 3645,3030 1080,3035 2720,3040 2105,3045 800,3100 1495,3100 3430,3105 1060,3115 1220,3125 3050,3130 1355,3140 2640,3150 1935,3165 2320,3165 3290,3165 1020,3175 1525,3185 2105,3185 3610,3200 3900,3215 1220,3220 4365,3220 3235,3235 3960,3235 2685,3255 1655,3260 3540,3270 3445,3275 3735,3275 3225,3300 4265,3300 1070,3325 1220,3325 2970,3325 3435,3325 3830,3325 3630,3330 890,3345 2405,3360 1010,3365 1220,3420 980,3435 815,3445 2725,3450 3178.58,3480.67 1485,3485 3425,3490 2425,3515 3930,3520 1095,3555 3645,3575 925,3585 3310,3585 4235,3610 1590,3720 2430,3735 2640,3740 2541.06,3747.57 860,3760 4430,3770 3705,3785 4055,3825 1095,3865 3285,3895 1475,3925 2080,3950 3600,3950 1760,3975 4110,3990 4445,4030 940,4075 3200,4100 3875,4175 1780,4205 3490,4210 1090,4225 4270,4315 2045,4335 1455,4370 3270,4370 1215,4425 2405,4425 3800,4445 1780,4450 2860,4505
  other v2: 1962.64,1022.31 2506.85,1025 3425,1285 3399.92,1285.55 3375,1295 3725,1471.3 3280.8,1552.16 4020,1695 3480,2203.7 3495,2635 1970,2760 2870,2818.15 1305,4105 1595,4105
  other v3: 2305,940 3019.68,940 3455,940 1150,1570 1195,1570 1794.82,2385.29 1840,2385
  other v4: 845,1420 890,1420 935,1420 845,1620 890,1620 935,1620
IO0: ESP_UART_UPLOAD.5 RL4.2 | length 520.9
  Bottom Layer w10: ESP_UART_UPLOAD.5 3565,1816.64 3899.9,2151.54 3900.2,2151.54 3916.85,2168.19 RL4.2
"NetCC2652P Mod_10": "CC2652P Mod.10" R2.2 | length 743.9
  Top Layer w10: v3(1794.82,2185.29) 1854.71,2185.29 v1(2152.5,1887.5)
  Bottom Layer w10: v3@1794.82,2185.18 v3(1794.82,2185.29) ; R2.2 2152.5,1625.65 v1(2152.5,1887.5)
"NetCC2652P Mod_16": "CC2652P Mod.16" RL5.1 | length 1448.4
  Bottom Layer w10: v3(1189.82,2335.29) 1485,2040.11 1485,1990 2050,1425 RL5.1
NetESP_1: ESP.1 R1.2 | length 1008.9
  Bottom Layer w10: R1.2 4220.49,2280.49 4375,2435 4375,2595 4335.12,2634.88 ESP.1@4335.12,3080.59
NetESP_16: ESP.16 RL3.1 | length 521.4
  Bottom Layer w10: RL3.1 3725,2310 3862.68,2447.68 ESP.16@3862.68,2529.41
NetESP_18: ESP.18 RL4.1 | length 349.4
  Bottom Layer w10: RL4.1@4020.16,2180 ESP.18@4020.16,2529.41
NetGD_1: GD.1 RLED2.2 | length 185.8
  Bottom Layer w10: GD.1 2615,1023.15 RLED2.2
NetP1_3: P1.3 RLED2.1 | length 928.8
  Bottom Layer w10: P1.3 1835,770 2450.51,770 2508.7,828.19 RLED2.1
NetP1_4: P1.4 RLED1.1 | length 365.4
  Bottom Layer w10: P1.4 1788.66,1025 1961.85,851.81 RLED1.1
NetRD_1: RD.1 RLED1.2 | length 182.6
  Bottom Layer w10: RLED1.2 2068.15,1021.53 RD.1
RXD2: PBB.7 PC.12 | length 365.1
  Top Layer w10: PBB.7 2775,4080 PC.12
RXD3: PBB.3 PC.8 | length 365.1
  Top Layer w10: PBB.3 2575,4080 PC.8
Shells: CESD.2 pad.1 RESD.2 | length 752.3
  Bottom Layer w10: pad.1 1106.57,4395 1293.22,4208.35 RESD.2 CESD.2
TCK: "CC2652P Mod.12" cJTAG.4 XDS110.11 | length 1399.4
  Top Layer w10: cJTAG.4 1905,2795 1905,2346.06 1855.02,2296.08 1852.31,2296.08 1844.27,2288.04 1844.27,2285.33 1817.94,2285.33 1841.56,2285.33 2215.27,2285.33 2248.95,2319 2314,2319 XDS110.11
  other v3: 1794.82,2285.29
TDI: "CC2652P Mod.18" XDS110.3 | length 1966.2
  Top Layer w10: v1(1990,1390) 2406,1806 2406,1919 XDS110.3
  Bottom Layer w10: v3(1190,2235) 1420,2005 1420,1920 1950,1390 v1(1990,1390)
TDO: "CC2652P Mod.17" XDS110.7 | length 2321.8
  Top Layer w10: v1(1970,1450) 2000,1450 2025,1475 v1(2025,1810)
  Bottom Layer w10: v3(1190,2285) 1455,2020 1455,1965 v1(1970,1450) ; v1(2025,1810) 2025,1860 2080,1915 2420,1915 2445,1940 2445,2080 XDS110.7
TMS: "CC2652P Mod.11" cJTAG.3 XDS110.1 | length 1462.4
  Top Layer w10: 1817.94,2235.33 1924.62,2235.33 2240.95,1919 2306,1919 XDS110.1
  Bottom Layer w10: cJTAG.3 1905,2695 1905,2345.47 v3(1794.82,2235.29)
TXD2: PBB.8 PC.10 | length 465.1
  Top Layer w10: PBB.8 2580,4275 2580,4185 2675,4090 PC.10
TXD3: PBB.4 PC.6 | length 461.7
  Top Layer w10: PBB.4 2430,4320 2384,4274 2384,4134.16 2475,4043.16 PC.6
VCC: AMS.2 CT2.1 ESPP.9 P0.5 P0.7 PC.3 ZGBP.20
  other v2: 3375,1195 3399.92,1195 3425,1195 3387.1,1552.16
ZGB_RST: CF4.2 cJTAG.5 P0.10 R2.1 RL6.1 XDS110.15 ZGB_RST.1 ZGB_UART_UPLOAD.6 | length 5679.8
  Top Layer w10: cJTAG.5 1760,3120 P0.10 ; ZGB_RST.1@2710,936.54 2710,1540 ZGB_UART_UPLOAD.6
  Bottom Layer w10: P0.10 2484.65,2710.35 RL6.1 2625.35,2705 2863.15,2705 CF4.2 CF4.2@2876.85,2705 ; XDS110.15 2580,2345 2580,1755 ; RL6.1@2620,2710 2620,2570.1 2920,2270.1 2920,1820 2855,1755 2580,1755 ; ZGB_UART_UPLOAD.6 2770,1610 2273.15,1610 R2.1 2260,1626.85 2260,1635 2380,1755 2580,1755
ZGB_RX: "CC2652P Mod.8" P0.2 PC.9 XDS110.18 ZGB_UART_UPLOAD.3 | length 3431.8
  Top Layer w10: P0.2 2160,2765 XDS110.18
  Bottom Layer w10: v3(1794.82,2085.29) 2023.2,2313.67 2023.2,2418.2 2260,2655 XDS110.18 2310,2715 2375.05,2715 2850,2240.05 2850,1980 ZGB_UART_UPLOAD.3 ; P0.2 2290,3435 PC.9
ZGB_TX: "CC2652P Mod.9" P0.4 PC.11 XDS110.17 ZGB_UART_UPLOAD.4 | length 3683.3
  Top Layer w10: P0.4 2060,2715 v1(2160,2615) 2310,2615 XDS110.17
  Bottom Layer w10: v3(1794.82,2135.29) 1975,2315.47 1975,2430 v1(2160,2615) ; P0.4 2130,3365 2320,3365 PC.11 ; XDS110.17 2695,2330 2695,1875 2765,1805 ZGB_UART_UPLOAD.4
ZGB_VCC: "CC2652P Mod.13" CF3.2 cJTAG.1 P0.8 RL6.2 XDS110.5
  other v2: 1970,2651.85 2620,2818.5
  other v3: 1794.82,2335.29 1840,2335
pads on no net: "CC2652P Mod.15" AMS.4 ESP.17 PBB.5 PBB.6 PBB.9 PBB.10 XDS110.2 XDS110.4 XDS110.6 XDS110.9 XDS110.13 XDS110.14 XDS110.19 XDS110.20

## Polygon pours and split planes (outlines as drawn)
GND on Bottom Layer "NONET_L-01_P-001" (solid, remove dead copper, pour order 3): 720,1695 995,1695 995,1340.35 995.24,1340.11 995.13,1340 740,1340 740,630 885,485 4660,485 4925,750 4925,4595 4755,4765 795,4765 605,4575
no net on Bottom Layer "NONET_L-01_P-001" (solid, pour order 0): 1250,5315
GND on Top Layer "NONET_L-01_P-001" (solid, remove dead copper, pour order 2): 720,1695 995,1695 995,1340.35 995.24,1340.11 995.13,1340 740,1340 740,630 885,485 4660,485 4925,750 4925,4595 4755,4765 795,4765 605,4575
GND on GNDL (split plane): 161 vertices, not listed, extent 780.03,640.03 4674.97,4534.97
ESP_VCC on PWRL (split plane): 4114.9,3312.11 3502.89,2700.1 3327.11,2700.1 2703.6,3323.6 2701.95,3324.71 2700,3325.1 1852.31,3325.1 1913.6,3386.4 1914.71,3388.05 1915.1,3390 1915.1,3479.9 4114.9,3479.9
+5 on PWRL (split plane): 2319.9,3852.89 2319.9,3792.11 2292.89,3765.1 1595,3765.1 1593.05,3764.71 1591.4,3763.6 1511.4,3683.6 1510.29,3681.95 1509.9,3680 1509.9,3480 1510.29,3478.05 1511.4,3476.4 1771.4,3216.4 1773.05,3215.29 1775,3214.9 2457.89,3214.9 3071.4,2601.4 3073.05,2600.29 3075,2599.9 3127.89,2599.9 3139.9,2587.89 3139.9,2532.11 3106.4,2498.61 3106.4,2498.6 2946.4,2338.6 2945.29,2336.95 2944.9,2335 2944.9,2180 2945.29,2178.05 2946.4,2176.4 3204.9,1917.89 3204.9,1300 3205.29,1298.05 3206.4,1296.4 3360,1142.79 3361.65,1141.69 3363.6,1141.3 3491.4,1141.3 3493.35,1141.69 3495,1142.79 3663.6,1311.4 3664.71,1313.05 3665.1,1315 3665.1,1387.89 3697.11,1419.9 4189.9,1419.9 4189.9,1147.11 3982.89,940.1 3242.11,940.1 3010.1,1172.11 3010.1,1380 3010.1,1775 3009.71,1776.95 3008.6,1778.6 2708.61,2078.6 2708.6,2078.6 2705.1,2082.11 2705.1,2175.1 2705.1,2700 2704.71,2701.95 2703.6,2703.6 2338.6,3068.6 2336.95,3069.71 2335,3070.1 1802.11,3070.1 1213.6,3658.6 1177.21,3695 1223.6,3741.4 1224.71,3743.05 1225.1,3745 1225.1,3750 1225.1,3817.89 1277.11,3869.9 2302.89,3869.9
ZGB_VCC on PWRL (split plane): 3284.9,3967.89 3284.9,3932.11 2982.89,3630.1 1783.03,3630.1 1781.08,3629.71 1779.43,3628.6 1691.4,3540.57 1690.29,3538.92 1689.9,3536.97 1689.9,3515 1690.29,3513.05 1691.4,3511.4 1721.4,3481.4 1723.05,3480.29 1725,3479.9 1904.9,3479.9 1904.9,3392.11 1837.89,3325.1 1777.11,3325.1 1600.1,3502.11 1600.1,3532.89 1777.11,3709.9 2955,3709.9 2956.95,3710.29 2958.6,3711.4 3123.6,3876.4 3124.71,3878.05 3125.1,3880 3125.1,3985 3124.71,3986.95 3123.6,3988.6 3098.6,4013.6 3096.95,4014.71 3095,4015.1 1180,4015.1 1178.05,4014.71 1176.4,4013.6 1081.4,3918.6 1080.29,3916.95 1079.9,3915 1079.9,3780 1080.29,3778.05 1081.4,3776.4 1146.4,3711.4 1206.4,3651.4 1796.4,3061.4 1798.05,3060.29 1800,3059.9 2332.89,3059.9 2694.9,2697.89 2694.9,2175.1 2694.9,2082.11 2632.89,2020.1 2057.11,2020.1 930.1,3147.11 930.1,3997.89 1018.6,4086.4 1019.06,4086.85 3165.94,4086.85
VCC on PWRL (split plane): 161 vertices, not listed, extent 780.03,640.03 4674.97,4534.97

## Keep-outs
Keep-Out Layer:
  lines w10: 4522.43,1887.43 4592.57,1887.43 cw(c4592.57,1785) 4695,1785 4695,722.43 cw(c4592.57,722.43) 4592.57,620 862.43,620 cw(c862.43,722.43) 760,722.43 760,4452.57 cw(c862.43,4452.57) 862.43,4555 4592.57,4555 cw(c4592.57,4452.57) 4695,4452.57 4695,3760 cw(c4592.57,3760) 4592.57,3657.57 4522.43,3657.57 ; 4522.43,1887.57 cw(c4522.43,1990) 4420,1990 4420,3555 cw(c4522.43,3555) 4522.43,3657.43

## Other copper
PWRL (plane layer: these items are gaps in the copper):
  lines w10: 1170,3695 1220,3745 1220,3750 1220,3820 1275,3875 2305,3875 2325,3855 2325,3790 2295,3760 1595,3760 1515,3680 1515,3480 1775,3220 2460,3220 3075,2605 3130,2605 3145,2590 3145,2530 3110,2495 2950,2335 2950,2180 3210,1920 3210,1300 3363.6,1146.4 3491.4,1146.4 3660,1315 3660,1390 3695,1425 4040,1425 4195,1425 4195,1145 3985,935 3240,935 3005,1170 3005,1380 3005,1775 2705,2075 2700,2080 ; 1210,3655 1800,3065 ; 1842.99,3320 2700,3320 3325,2695 3435,2695 3460,2695 3505,2695 4120,3310 4120,3485 2218.05,3485 1800,3485 1725,3485 1695,3515 1695,3536.97 1783.03,3625 2985,3625 3290,3930 3290,3970 3168.05,4091.95 1016.95,4091.95 1015,4090 925,4000 925,3145 2055,2015 2635,2015 2700,2080 ; 1910,3485 1910,3390 1840,3320 1775,3320 1595,3500 1595,3535 1775,3715 2955,3715 3120,3880 3120,3985 3095,4010 1180,4010 1085,3915 1085,3780 1150,3715 1800,3065 ; 1800,3065 2335,3065 2700,2700 2700,2175.1 2700,2080

## Silkscreen, mask and mechanical layers (free items; w line width, h text height)
Top Overlay:
  text "ESP_D6-ZGB_RST" at 1733.33,4305 h50 r270
  text "ZGB-VCC" at 1835,3955 h50 r270
  text "ESP-VCC" at 1935,3955 h50 r270
  text "VCC" at 945,3750 h50
  text "5V" at 1365,3750 h50
  text "DIO_27-19" at 995,3700 h60 r270
  text "GND" at 1365,3650 h50
  text "5V" at 2300,3650 h50 r90
  text "VCC" at 2400,3595 h50 r90
  text "DIO_18" at 1365,3553.33 h50
  text "ESP-SCL" at 2900,3395 h50 r90
  text "ESP-SDA" at 3000,3395 h50 r90
  text "ESPRX-TX3" at 2500,3295 h50 r90
  text "ESPTX-RX3" at 2600,3295 h50 r90
  text "ZGBRX-TX2" at 2700,3295 h50 r90
  text "ZGBTX-RX2" at 2800,3295 h50 r90
  text "ZGB-ESP" at 1945,3275 h50
  text "DIO_5-11" at 1455,2850 h60 r90
  text "rev 1.1" at 4270,1060 h36
Mechanical 1:
  lines w10: 4522.43,1887.43 4592.57,1887.43 cw(c4592.57,1785) 4695,1785 4695,722.43 cw(c4592.57,722.43) 4592.57,620 862.43,620 cw(c862.43,722.43) 760,722.43 760,4452.57 cw(c862.43,4452.57) 862.43,4555 4592.57,4555 cw(c4592.57,4452.57) 4695,4452.57 4695,3760 cw(c4592.57,3760) 4592.57,3657.57 4522.43,3657.57 ; 4522.43,1887.57 cw(c4522.43,1990) 4420,1990 4420,3555 cw(c4522.43,3555) 4522.43,3657.43

## Text inside footprints (layer, text, board x,y; h text height)
Designator42: Top Overlay "JLCJLCJLCJLC" at 3187.87,1702.87 h39.37
Designator43: Top Overlay "Designed By CYJ" at 3400,4029.99 h60
P1: Top Overlay "GREEN" at 1250,900 h50; Top Overlay "RED" at 1350,1000 h50